# Altium PCB Pcb1.PcbDoc
Units mm, origin at the board's own origin, x right, y up, seen from the top; angles counter-clockwise.
Board outline 25.94 x 43.74 mm, 4 copper layers (Top Layer, Int1 (GND), Int2 (PWR), Bottom Layer), stack 1.369 mm thick; 56 components, 27 nets, 162 pads, 88 vias.
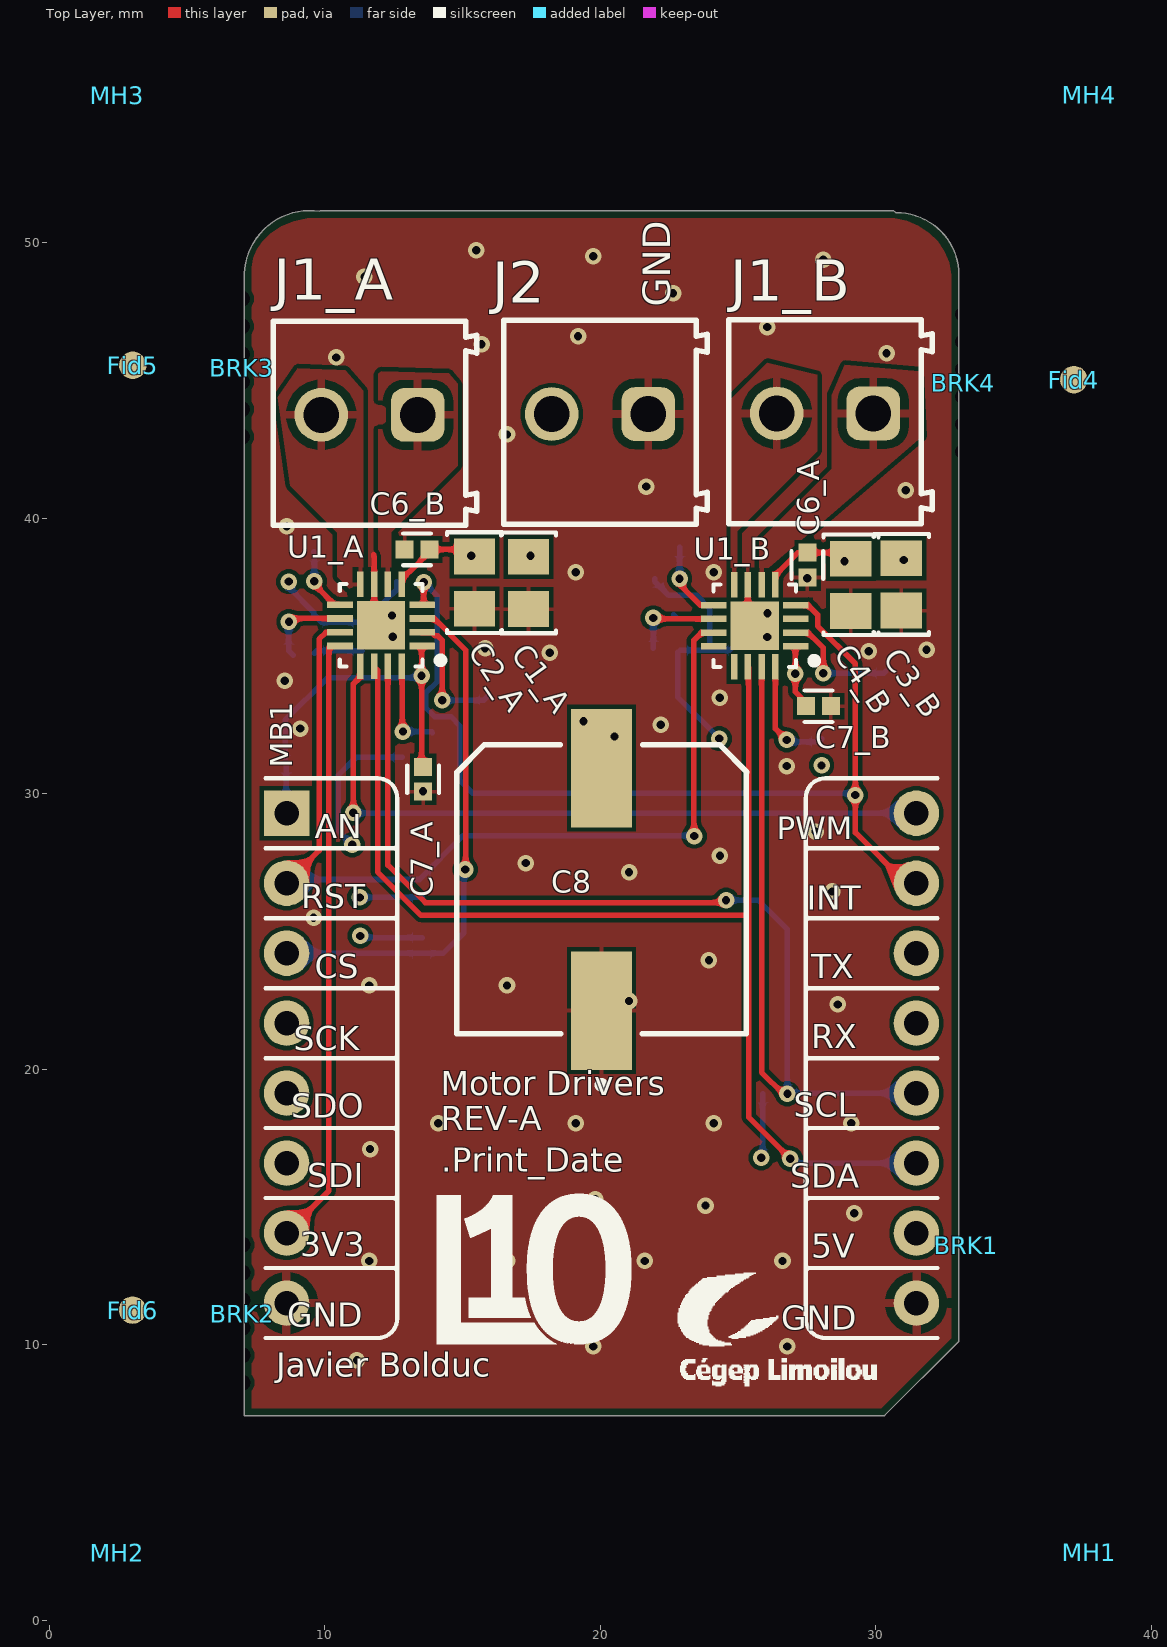
[diagram p0: Top Layer view]
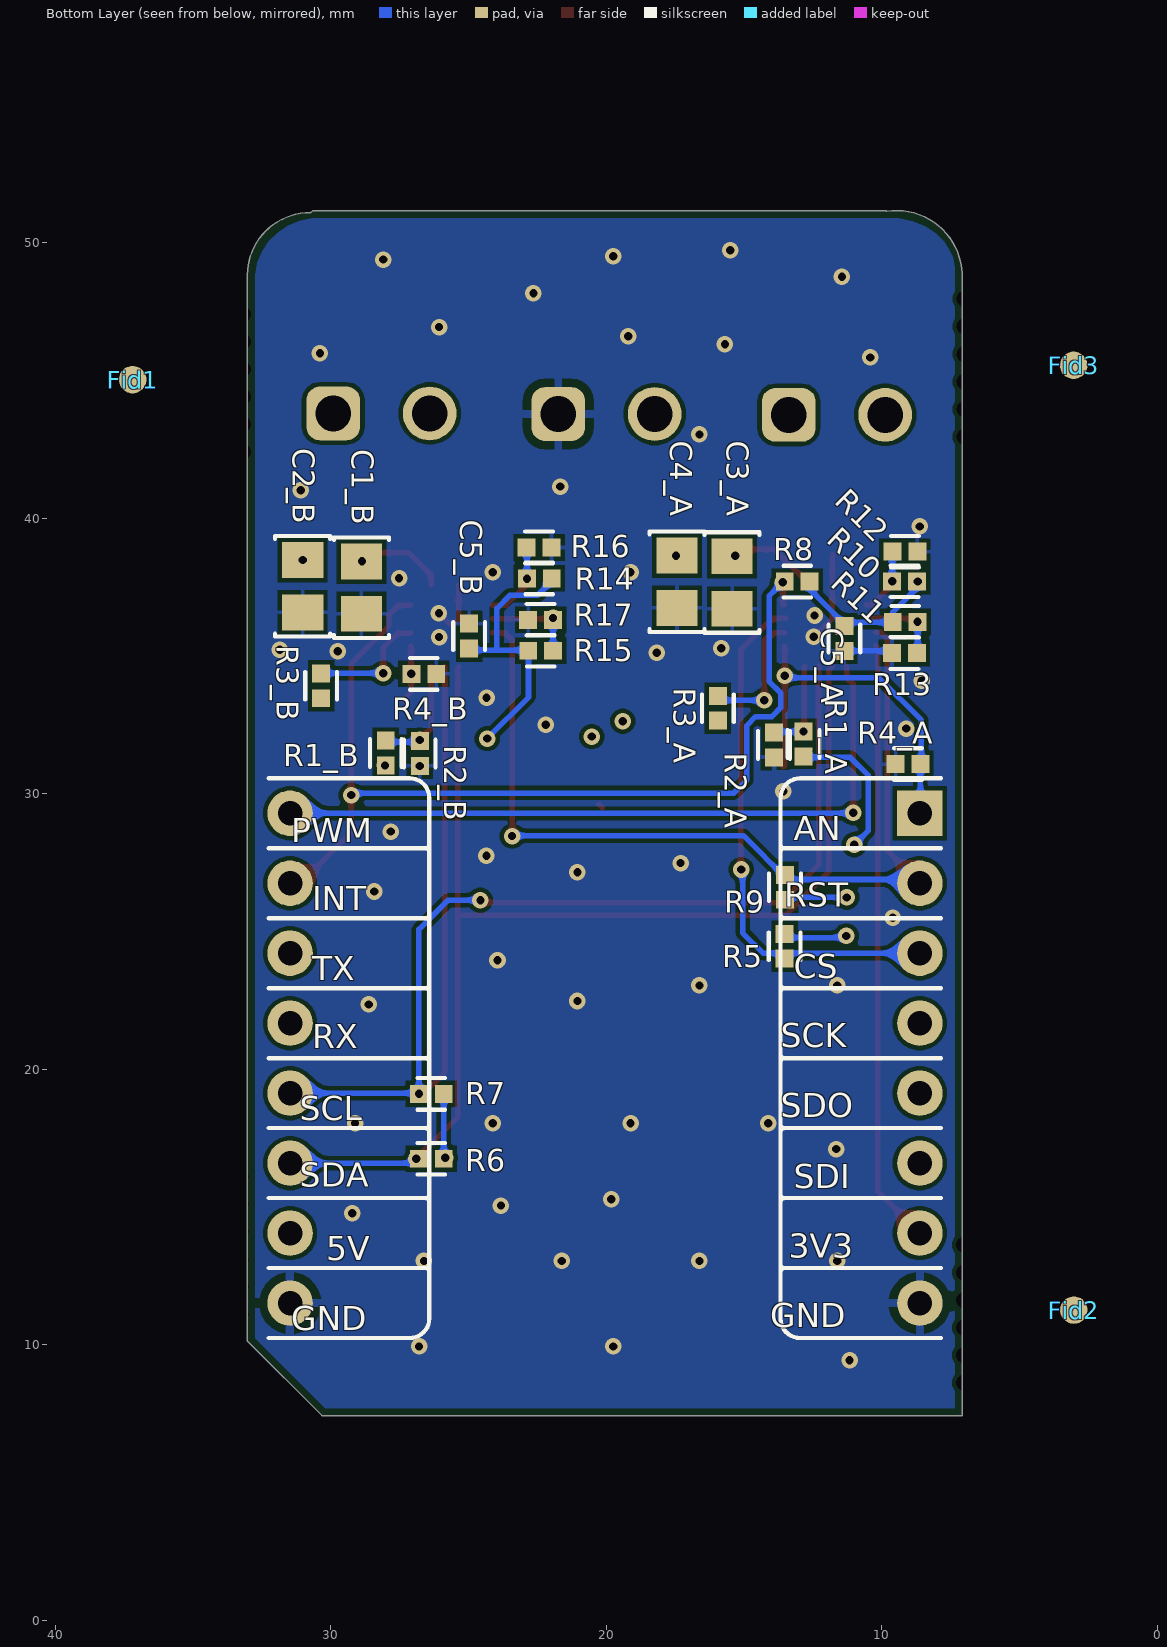
[diagram p1: Bottom Layer view, seen from below]
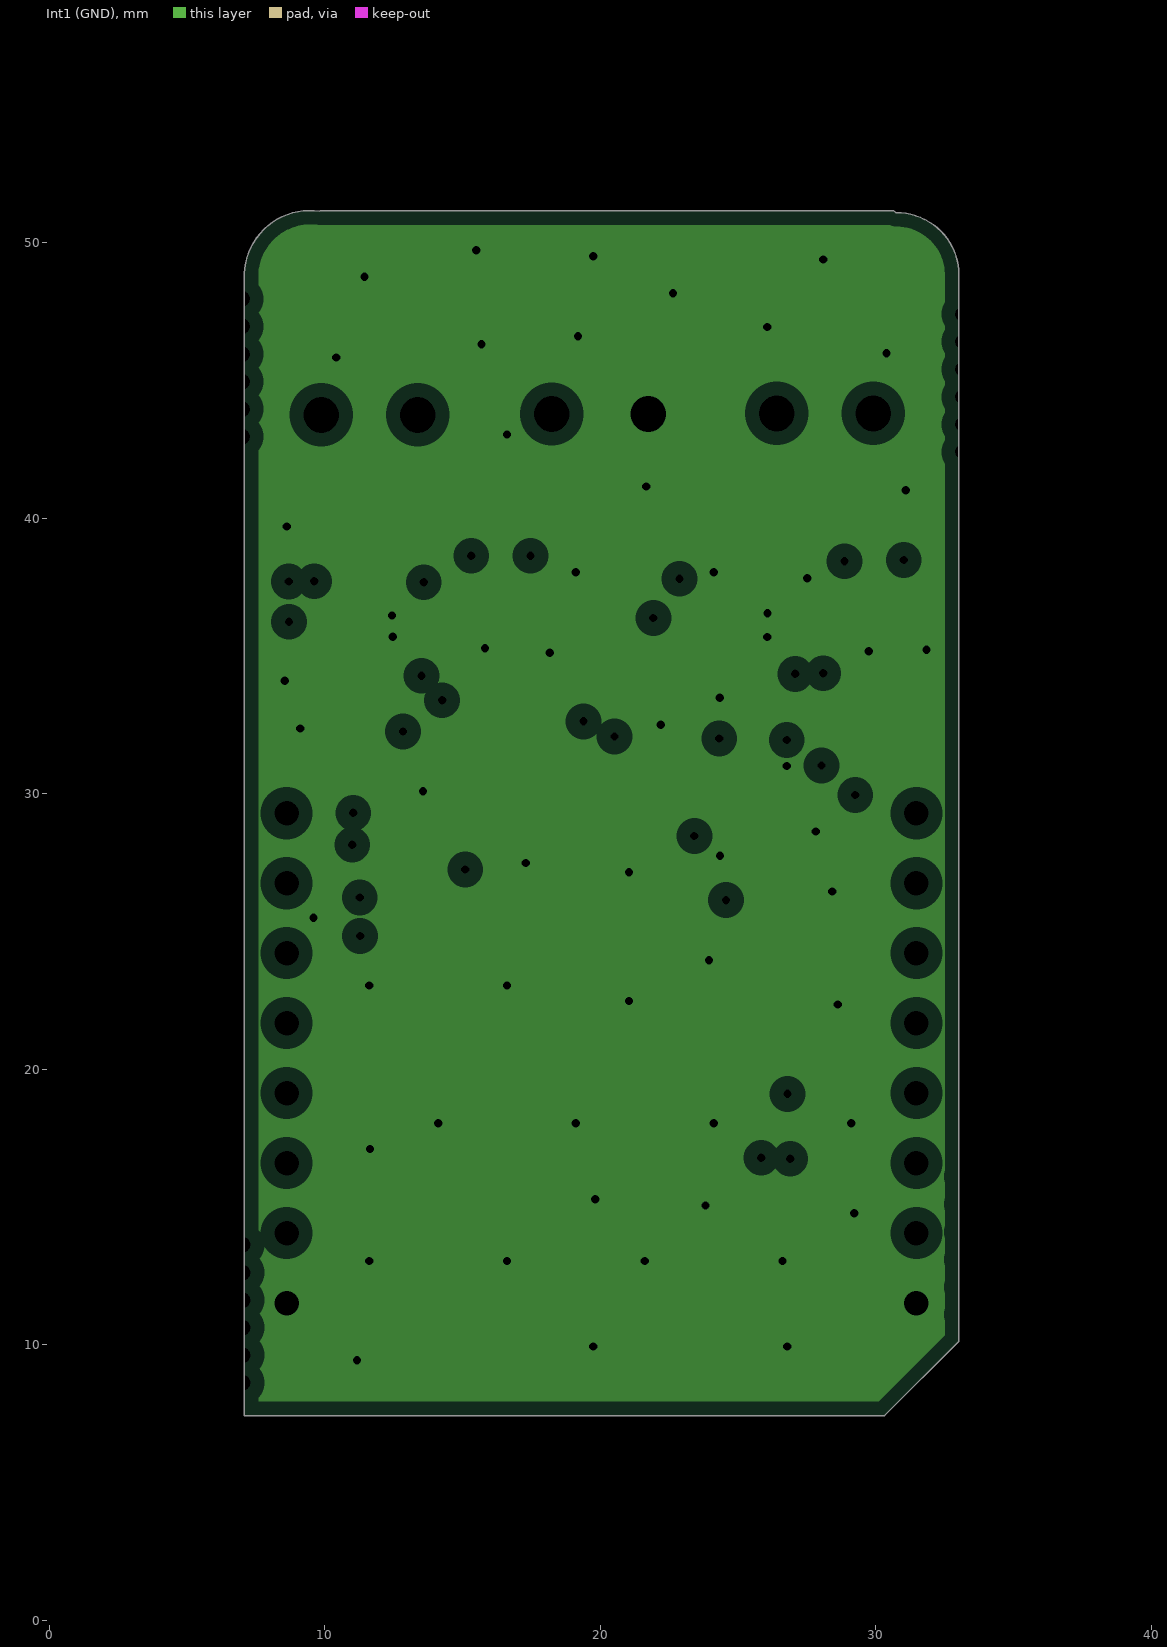
[diagram p2: Int1 (GND), clearances drawn from the general rule]
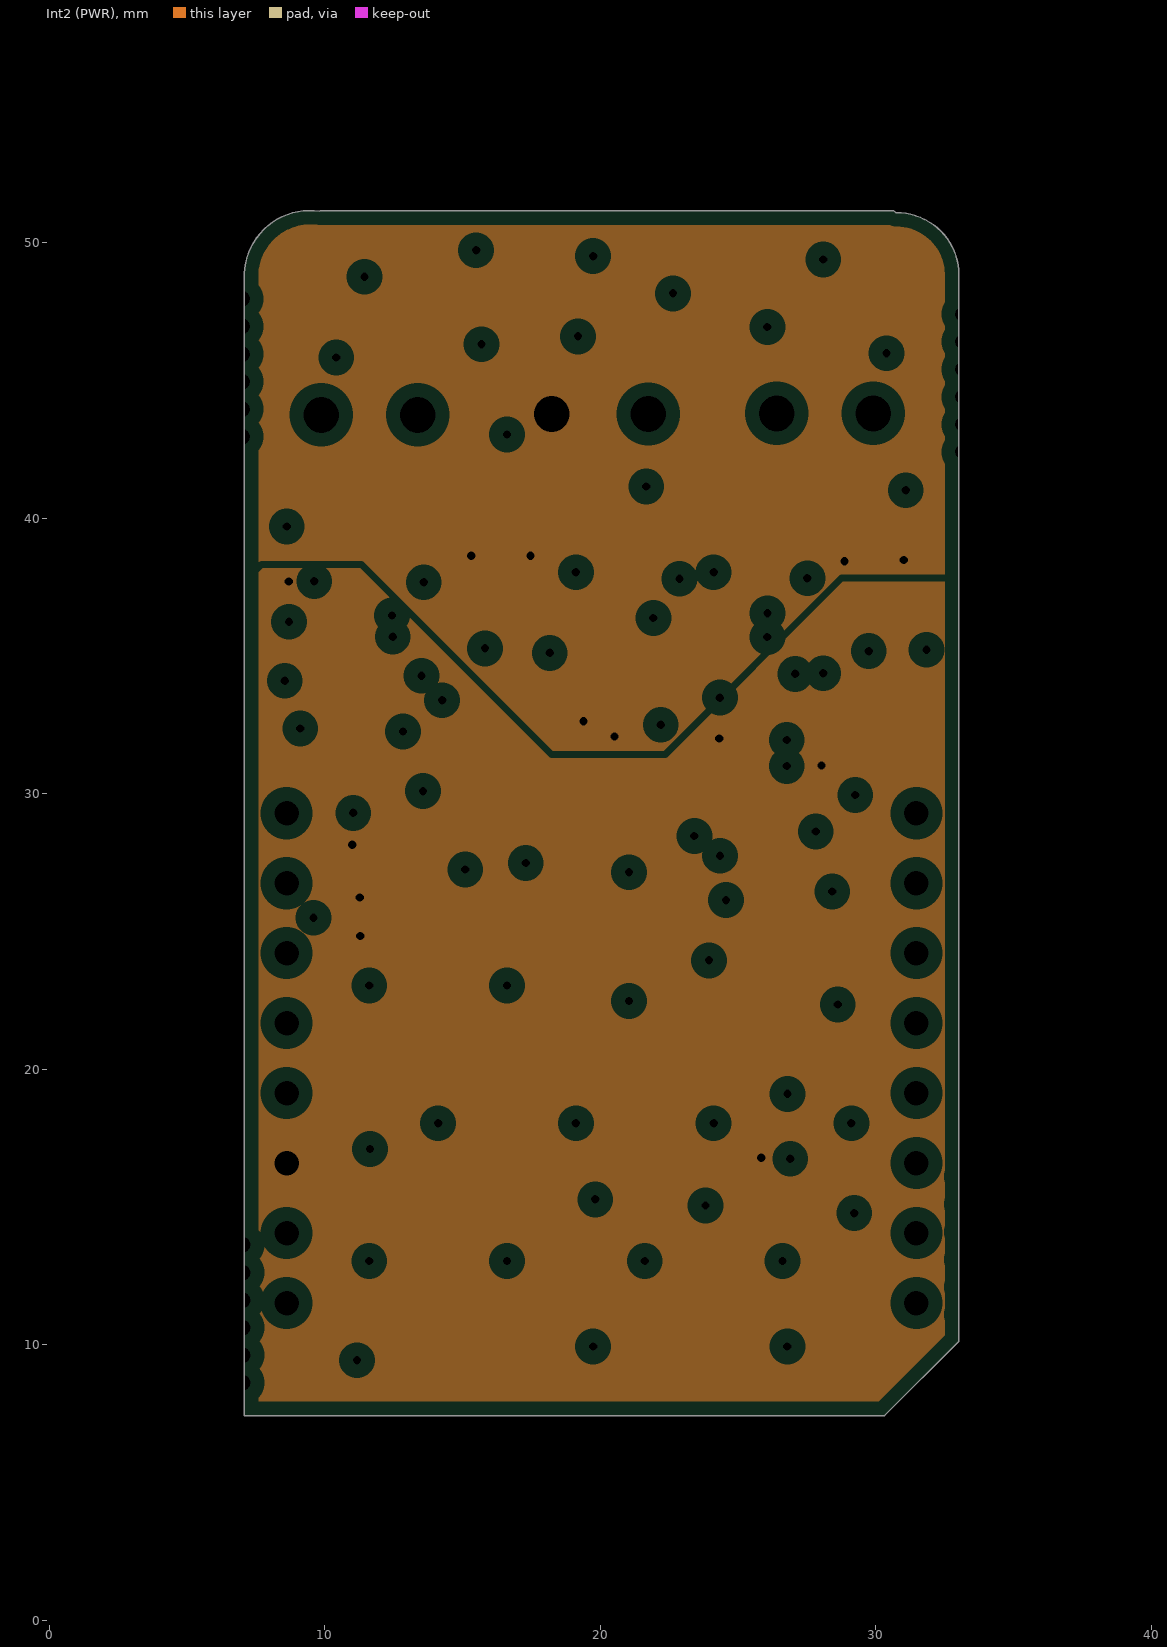
[diagram p3: Int2 (PWR), clearances drawn from the general rule]

## Layer stack, top to bottom
Top Solder: solder mask 0.0254, SM-001, Dk 4
Top Layer: signal copper 0.035
Dielectric 1: prepreg 0.1295, PP-017, Dk 4.3
Dielectric 2: prepreg 0.1295, PP-017, Dk 4.3
Int1 (GND): plane copper 0.035, net GND
Dielectric 3: core 0.7112, Core-039, Dk 4.8
Int2 (PWR): plane copper 0.035, net (Multiple Nets)
Dielectric 4: prepreg 0.1295, PP-017, Dk 4.3
Dielectric 5: prepreg 0.1295, PP-017, Dk 4.3
Bottom Layer: signal copper 0.035
Bottom Solder: solder mask 0.0254, SM-001, Dk 4

## Board outline
7.089,7.425 7.089,48.682 7.083,48.67 cw(c9.475,48.775) 9.83,51.143 9.836,51.155 30.664,51.155 30.741,51.092 cw(c30.741,48.785) 32.371,50.416 cw(c30.789,48.834) 33.026,48.834 33.026,10.126 30.325,7.425

## Design rules (kind name [scope] priority, off if disabled: settings)
BoardOutlineClearance [All] p1: gap=0.2 ignorepadtopadclearanceinfootprint=FALSE
Clearance [All] p1: gap=0.15 ignorepadtopadclearanceinfootprint=FALSE
DiffPairsRouting [All] p1: maxlimit=0.125 minlimit=0.125 mostfreqgap=0.125 toplayer_minwidth=0.125 toplayer_maxwidth=0.125 toplayer_prefwidth=0.125 bottomlayer_minwidth=0.125 bottomlayer_maxwidth=0.125 bottomlayer_prefwidth=0.125 maxuncoupledlength=15
HoleSize [All] p1: absolutevalues=TRUE maxlimit=5 minlimit=0.2 maxpercent=80.000 minpercent=20.000
HoleToHoleClearance [All] p1: gap=0.3 allowstackedmicrovias=TRUE
MinimumSolderMaskSliver [All] p1: minsoldermaskwidth=0.075
PlaneClearance [All] p1: clearance=0.5
PlaneConnect [All] p1: pad.planeconnectstyle=Relief pad.reliefexpansion=0.508 pad.reliefentries=4 pad.reliefconductorwidth=0.254 pad.reliefairgap=0.15 via.planeconnectstyle=Direct via.reliefexpansion=0.508 via.reliefentries=4 via.reliefconductorwidth=0.254 via.reliefairgap=0.254
PolygonConnect [All] p1: thpad.connectstyle=Relief thpad.reliefconductorwidth=0.3 thpad.reliefentries=4 thpad.polygonreliefangle="90 Angle" thpad.airgapwidth=0.3 smdpad.connectstyle=Relief smdpad.reliefconductorwidth=0.15 smdpad.reliefentries=4 smdpad.polygonreliefangle="90 Angle" smdpad.airgapwidth=0.15 via.connectstyle=Direct via.reliefconductorwidth=0.254 via.reliefentries=4 via.polygonreliefangle="90 Angle" via.airgapwidth=0.254
RoutingVias [All] p1: holewidth=0.3 width=0.6 viastyle="Through Hole" minholewidth=0.3 minwidth=0.6 maxholewidth=0.7 maxwidth=1.2
SilkToSilkClearance [All] p1: silktosilkclearance=0
SilkToSolderMaskClearance [IsPad] p1: minsilkscreentomaskgap=0 clearancetoexposedcopper=TRUE
SolderMaskExpansion [All] p1: expansion=0.102 istentingtop=FALSE
Width [All] p1: maxlimit=5 minlimit=0.15 preferedwidth=0.2
22 further rules are at their usual default settings.

## Classes and differential pairs
channel class Driver: MotorDrive-A MotorDrive-B
component class MotorDrive-B: C1_B C2_B C3_B C4_B C5_B C6_B C7_B J1_B R1_B R2_B R3_B R4_B U1_B
component class MotorDrive-A: C1_A C2_A C3_A C4_A C5_A C6_A C7_A J1_A R1_A R2_A R3_A R4_A U1_A
component class Cegep-tabloid: BRK1 BRK2 BRK3 BRK4 C8 Fid1 Fid2 Fid3 Fid4 Fid5 Fid6 J2 MB1 MH1 MH2 MH3 MH4 R5 R6 R7 R8 R9 R10 R11 R12 R13 R14 R15 R16 R17

## Components (designator, comment, footprint, x,y, rotation, side; value= is the part's Value field where it differs from the comment)
BRK1 "DNP" BK_CRACK1B_M 33.286,16.098 r90 top value=2mm
BRK2 "DNP" BK_CRACK1B_M 7.009,8.619 r270 top value=2mm
BRK3 "DNP" BK_CRACK1B_M 6.989,42.96 r270 top value=2mm
BRK4 "DNP" BK_CRACK1B_M 33.19,47.407 r90 top value=2mm
C1_A "CAP CER 10uF 25V X5R 0805" C_2012[0805] 17.4,37.65 r270 top value=10uF (schematic designator C1)
C1_B "CAP CER 10uF 25V X5R 0805" C_2012[0805] 28.889,37.479 r270 bottom value=10uF (schematic designator C1)
C2_A "CAP CER 10uF 25V X5R 0805" C_2012[0805] 15.441,37.665 r270 top value=10uF (schematic designator C2)
C2_B "CAP CER 10uF 25V X5R 0805" C_2012[0805] 31.023,37.53 r270 bottom value=10uF (schematic designator C2)
C3_A "CAP CER 10uF 25V X5R 0805" C_2012[0805] 15.435,37.666 r270 bottom value=10uF (schematic designator C3)
C3_B "CAP CER 10uF 25V X5R 0805" C_2012[0805] 30.934,37.595 r270 top value=10uF (schematic designator C3)
C4_A "CAP CER 10uF 25V X5R 0805" C_2012[0805] 17.434,37.694 r270 bottom value=10uF (schematic designator C4)
C4_B "CAP CER 10uF 25V X5R 0805" C_2012[0805] 29.102,37.581 r270 top value=10uF (schematic designator C4)
C5_A "CAP CER 100nF 50V 0402" C_1005[0402] 11.359,35.633 r270 bottom value=100nF (schematic designator C5)
C5_B "CAP CER 100nF 50V 0402" C_1005[0402] 24.981,35.722 r90 bottom value=100nF (schematic designator C5)
C6_A "CAP CER 100nF 50V 0402" C_1005[0402] 27.525,38.3 r270 top value=100nF (schematic designator C6)
C6_B "CAP CER 100nF 50V 0402" C_1005[0402] 13.352,38.866 r180 top value=100nF (schematic designator C6)
C7_A "CAP CER 10nF 50V X7R 0402" C_1005[0402] 13.575,30.525 r90 top value=10nF (schematic designator C7)
C7_B "CAP CER 10nF 50V X7R 0402" C_1005[0402] 27.928,33.176 r180 top value=10nF (schematic designator C7)
C8 "CAP EL 100uF 63V 10MM" C_EL_D10MM-L11MM 20.051,26.529 r90 top value=100uF
Fid1 "DNP" FD_Fiducial#1 37.193,45.03 r0 top value="Fiducial for Pick&Place"
Fid2 "DNP" FD_Fiducial#1 3.029,11.256 r90 top value="Fiducial for Pick&Place"
Fid3 "DNP" FD_Fiducial#1 3.035,45.551 r90 top value="Fiducial for Pick&Place"
Fid4 "DNP" FD_Fiducial#2 37.193,45.03 r90 top value="Fiducial for Pick&Place"
Fid5 "DNP" FD_Fiducial#2 3.035,45.551 r90 top value="Fiducial for Pick&Place"
Fid6 "DNP" FD_Fiducial#2 3.029,11.256 r90 top value="Fiducial for Pick&Place"
J1_A "DB301V-3.5-2P-GN-S" CONN_TERM_BLOCK_2POS_3mm5 11.628,43.451 r180 top (schematic designator J1)
J1_B "DB301V-3.5-2P-GN-S" CONN_TERM_BLOCK_2POS_3mm5 28.162,43.503 r180 top (schematic designator J1)
J2 "DB301V-3.5-2P-GN-S" CONN_TERM_BLOCK_2POS_3mm5 19.994,43.48 r180 top
MB1 "mikroBUS" "mikroBUS - Midi" 7.35,7.7 r0 top locked
MH1 "DNP" MP_M-Hole_M2-NonPlated 37.75,2.45 r0 top value="Mounting Hole 2mm non plated"
MH2 "DNP" MP_M-Hole_M2-NonPlated 2.475,2.45 r0 top value="Mounting Hole 2mm non plated"
MH3 "DNP" MP_M-Hole_M2-NonPlated 2.475,55.35 r0 top value="Mounting Hole 2mm non plated"
MH4 "DNP" MP_M-Hole_M2-NonPlated 37.75,55.35 r0 top value="Mounting Hole 2mm non plated"
R1_A "Res 2k2 1% 0402" R_1005[0402] 12.843,31.805 r90 bottom value=2k2 (schematic designator R1)
R1_B "Res 2k2 1% 0402" R_1005[0402] 28.005,31.477 r90 bottom value=2k2 (schematic designator R1)
R2_A "Res 2k2 1% 0402" R_1005[0402] 13.914,31.771 r270 bottom value=DNP (schematic designator R2)
R2_B "Res 2k2 1% 0402" R_1005[0402] 26.77,31.46 r270 bottom value=DNP (schematic designator R2)
R3_A "Res 2k2 1% 0402" R_1005[0402] 15.95,33.1 r270 bottom value=DNP (schematic designator R3)
R3_B "Res 2k2 1% 0402" R_1005[0402] 30.352,33.914 r270 bottom value=DNP (schematic designator R3)
R4_A "Res 7k5 1% 0402" R_1005[0402] 9.05,31.075 r0 bottom value=7k5 (schematic designator R4)
R4_B "Res 7k5 1% 0402" R_1005[0402] 26.625,34.35 r180 bottom value=7k5 (schematic designator R4)
R5 "Res 10k 1% 0402" R_1005[0402] 13.529,24.462 r270 bottom value=10k
R6 "Res 2k2 1% 0402" R_1005[0402] 26.35,16.75 r0 bottom value=2k2
R7 "Res 2k2 1% 0402" R_1005[0402] 26.35,19.104 r0 bottom value=2k2
R8 "Res 10k 1% 0402" R_1005[0402] 13.072,37.697 r0 bottom value=10k
R9 "Res 2k2 1% 0402" R_1005[0402] 13.514,26.6 r90 bottom value=DNP
R10 "Res 2k2 1% 0402" R_1005[0402] 9.174,37.71 r0 bottom value=DNP
R11 "Res 2k2 1% 0402" R_1005[0402] 9.155,36.238 r180 bottom value=DNP
R12 "Res 2k2 1% 0402" R_1005[0402] 9.161,38.786 r180 bottom value=2k2
R13 "Res 2k2 1% 0402" R_1005[0402] 9.179,35.107 r0 bottom value=2k2
R14 "Res 2k2 1% 0402" R_1005[0402] 22.429,37.817 r0 bottom value=DNP
R15 "Res 2k2 1% 0402" R_1005[0402] 22.383,35.189 r180 bottom value=2k2
R16 "Res 2k2 1% 0402" R_1005[0402] 22.442,38.938 r180 bottom value=2k2
R17 "Res 2k2 1% 0402" R_1005[0402] 22.387,36.312 r0 bottom value=DNP
U1_A "DRV8234RTER" U_WQFN50P300X300-16 12.047,36.111 r180 top (schematic designator U1)
U1_B "DRV8234RTER" U_WQFN50P300X300-16 25.613,36.097 r180 top (schematic designator U1)

## Footprints (in the part's own frame and the unit in brackets; to place one, negate y for a bottom-side part, rotate by r counter-clockwise, add the part's x,y. Pads: shape width x height; smd on the part's side, far side on the other; paste and mask are expansions set on the pad)
BK_CRACK1B_M [mm] "Cracker métrique NPTH"
  round 0 hole 0.6 unplated: 1(0,0) 2(-1,0) 3(-2,0) 4(-3,0) 5(-4,0) 6(-5,0)
C_1005[0402] [mm] "Capacitor MLCC; Body 1.1 x 0.5 mm (LxW typ)"
  rect 0.65x0.65 smd mask+0.075: 1(-0.45,0) 2(0.45,0)
  silkscreen extent -0.5,-0.57 0.5,0.58, body extent -0.51,-0.25 0.51,0.25, height 0.51
C_2012[0805] [mm] "Capacitor MLCC; Body 2.0 x 1.3 mm (LxW typ)"
  rect 1.3x1.5 smd: 1(-0.95,0) 2(0.95,0)
  silkscreen extent -1.83,-1 1.83,1, body extent -1,-0.62 1,0.63, height 0.78
C_EL_D10MM-L11MM [mm] "SMD, D10xL10.5mm"
  rect 4.3x2.2 smd paste+0 mask+0: 1(-4.4,0) 2(4.4,0)
  silkscreen extent -7.22,-5.28 5.25,5.25, body extent -6.8,-5.5 6.8,5.5, height 0.25
CONN_TERM_BLOCK_2POS_3mm5 [mm] "3.50 mm Horizontal Entry Modular, 2p"
  rrect50% 1.95x1.95 hole 1.3: 1(-1.75,-0.3)
  round 1.95 hole 1.3: 2(1.75,-0.3)
  silkscreen extent -3.9,-3.7 3.5,3.7, body extent -3.95,-3.7 3.5,3.7, height 8.55
FD_Fiducial#1 [mm] "Fiducial"
  round 1 smd far side paste-0.5 mask+1: 1(0,0)
FD_Fiducial#2 [mm] "Fiducial"
  round 1 smd paste-0.5 mask+1: 1(0,0)
"mikroBUS - Midi" [mil]
  rect 65x65 hole 35: 1(50,850)
  round 65 hole 35: 2(50,750) 3(50,650) 4(50,550) 5(50,450) 6(50,350) 7(50,250) 8(50,150) 9(950,150) 10(950,250) 11(950,350) 12(950,450) 13(950,550) 14(950,650) 15(950,750) 16(950,850)
  silkscreen extent 20,100 980,900, body extent -5,100 1010,900, height 82
MP_M-Hole_M2-NonPlated [mm] "Monting Hole M2 non plated"
  round 1.5 hole 2.5 unplated paste-2539.97: 1(0,0)
R_1005[0402] [mm] "Chip Resistor; Body 1.1 x 0.5 mm (LxW typ)"
  rect 0.65x0.65 smd mask+0.075: 1(-0.45,0) 2(0.45,0)
  silkscreen extent -0.5,-0.57 0.5,0.58, body extent -0.5,-0.25 0.5,0.26, height 0.36
U_WQFN50P300X300-16 [mm]
  rect 0.931x0.239 smd paste+0 mask+0: 1(-1.491,0.75) 2(-1.491,0.25) 3(-1.491,-0.25) 4(-1.491,-0.75) 9(1.491,-0.75) 10(1.491,-0.25) 11(1.491,0.25) 12(1.491,0.75)
  rect 0.239x0.931 smd paste+0 mask+0: 5(-0.75,-1.491) 6(-0.25,-1.491) 7(0.25,-1.491) 8(0.75,-1.491) 13(0.75,1.491) 14(0.25,1.491) 15(-0.25,1.491) 16(-0.75,1.491)
  rect 1.75x1.75 smd paste-0.862 mask+0: 17(0,0)
  silkscreen extent -2.28,-1.5 1.5,1.5, body extent -1.5,-1.5 1.5,1.5, height 0.8

## Part data
BRK1 BRK2 BRK3 BRK4: library part BK_BREAKOUT_2MM, "Mouse Bites", Manufacturer_PN=DNP, RoHS=N/A, Technology=N/A
C1_A C1_B C2_A C2_B C3_A C3_B C4_A C4_B: library part CAP020, "Capacitor type 1", Dielectric=X5R, Manufacturer 1=Samsung, Manufacturer Part Number 1=CL21A106KAYNNNE, Rated Voltage=25V, Supplier Part Number 1=C86038, Tolerance=10%, LibRef=CAP020, Mounting Technology=SMT, Supplier 1=LCSC
C5_A C5_B C6_A C6_B: library part CAP001, "Capacitor type 1", Dielectric=X7R, Manufacturer 1="Taiyo Yuden", Manufacturer Part Number 1=UMK105B7104KV-FR, Rated Voltage=50V, Supplier Part Number 1=C2167491, Tolerance=10%, Code CEGEP=KCOND01SM, LibRef=CAP001, Mounting Technology=SMT, Supplier 1=LCSC
C7_A C7_B: library part CAP017, "Capacitor type 1", Dielectric=X7R, Manufacturer 1=Yageo, Manufacturer Part Number 1=CC0402KRX7R9BB103, Rated Voltage=50V, Supplier Part Number 1=C60133, Tolerance=10%, LibRef=CAP017, Mounting Technology=SMT, Supplier 1=LCSC
C8: library part CAP021, "Capacitor type EL", Dielectric=EL, Manufacturer 1=HRK, Manufacturer Part Number 1=GVT1J107M1010CNVC, Rated Voltage=63V, Supplier Part Number 1=C2983410, Tolerance=20%, LibRef=CAP021, Mounting Technology=SMT, Supplier 1=LCSC
Fid1 Fid2 Fid3 Fid4 Fid5 Fid6: library part Fiducial, "Fiducial for Pick&Place", Manufacturer_PN=DNP
J1_A J1_B J2: library part CONN-3MM5-2POS-TERM-BLOCK, "CONN TERM BLOCK 2POS 3.5mm pitch", Manufacturer 1=Dorabo, Supplier Part Number 1=C695629, Manufacturer Part Number 1=DB301V-3.5-2P-GN-S, Mounting Technology=TH, Supplier 1=LCSC
MB1: library part "mikroBUS compatible add-on board", "mikroBUS compatible add-on board"
MH1 MH2 MH3 MH4: library part MH-2MM_NP, "Mounting Hole 2mm non plated", Supplier Part Number 1=N/A, Manufacturer Part Number 1=DNP
R1_A R1_B R2_A R2_B R3_A R3_B R6 R7 R9 R10 R11 R12 R13 R14 R15 R16 R17: library part RES008, "Resistor type 1", Manufacturer 1=Yageo, Manufacturer Part Number 1=RC0402FR-072K2L, Max Working Voltage=50V, Supplier Part Number 1=C114762, Tolerance=1%, Code CEGEP=RES2.2KSM, LibRef=RES008, Mounting Technology=SMT, Puissance=1/16W, Supplier 1=LCSC, Supplier 2=Digi-Key, Supplier Part Number 2=311-2.20KLRCT-ND
R4_A R4_B: library part RES027, "Resistor type 1", Manufacturer 1=Yageo, Manufacturer Part Number 1=RC0402FR-077k5L, Max Working Voltage=50V, Supplier Part Number 1=C137934, Tolerance=1%, LibRef=RES027, Mounting Technology=SMT, Puissance=1/16W, Supplier 1=LCSC
R5 R8: library part RES003, "Resistor type 1", Manufacturer 1=Yageo, Manufacturer Part Number 1=RC0402FR-0710KL, Max Working Voltage=50V, Supplier Part Number 1=C60490, Tolerance=1%, LibRef=RES003, Mounting Technology=SMT, Puissance=1/16W, Supplier 1=LCSC
U1_A U1_B: library part U_DRV8234, "Brushed DC H-bridge Motor Driver with Ripple Counting, Stall Detection, and Speed Regulation 38V 2A 16-WQFN", Manufacturer 1="Texas Instruments", Manufacturer Part Number 1=DRV8234RTER, Mounting Technology=SMT, Supplier 1=LCSC

## Via types
v1: diameter 0.6, hole 0.3, Top Layer to Bottom Layer, tented both sides, 85 vias
v2: diameter 0.6, hole 0.3, Top Layer to Bottom Layer, tented bottom, 2 vias
v3: diameter 0.6, hole 0.3, Top Layer to Bottom Layer, 1 vias

## Nets (pads, with @x,y where several pads share a name; then routed paths per layer and width w, separated by ;. In a path a pad name is that pad's centre, name@x,y a point inside that pad or via, vN(x,y) a via of type N, cw(c..) or ccw(c..) an arc to the next point about the centre after c; other vN are vias at no path point)
DIR: MB1.7 U1_A.12 | length 22
  Top Layer w0.2: MB1.7 10.15,15.58 10.15,35.301 U1_A.12@10.218,35.368
FAULT: MB1.15 R8.2 U1_A.4 U1_B.4 | length 36.3
  Top Layer w0.2: U1_A.4 13.577,36.861 13.597,36.88 v1(13.597,37.677) ; U1_B.4 27.542,36.847 27.893,36.496 27.893,36.087 29.263,34.717 v1(29.263,29.949) 29.263,28.585 31.098,26.75 MB1.15
  Bottom Layer w0.2: v1(13.597,37.677) 14.094,37.18 14.094,34.078 13.668,33.653 13.668,33.121 13.993,32.796 14.579,32.796 14.9,32.475 14.9,30.5 15.375,30.025 29.187,30.025 v1(29.263,29.949)
GND: C1_A.2 C1_B.2 C2_A.2 C2_B.2 C3_A.2 C3_B.2 C4_A.2 C4_B.2 C5_A.2 C5_B.2 C6_A.2 C6_B.2 C7_A.1 C7_B.1 C8.1 J2.1 MB1.8 MB1.9 R2_A.2 R2_B.2 R4_A.2 R4_B.2 R12.2 R13.2 R16.2 R17.2 U1_A.7 U1_A.17 U1_B.7 U1_B.17 | length 7.5
  Top Layer w0.2: 11.775,38.675 11.775,38.625 11.797,38.603 U1_A.7 11.797,36.361 U1_A.17 12.064,36.111 v1(12.475,35.7) ; U1_B.7 25.363,36.347 U1_B.17 26.067,36.552 v1(26.077,36.552)
  Bottom Layer w0.2: R13.2 9.706,35.183 C5_A.2 ; R17.2@22.666,36.504 R17.2@22.793,36.377
  other v1: 11.171,9.437 19.746,9.937 26.796,9.937 11.62,13.04 16.62,13.04 21.62,13.04 26.62,13.04 29.225,14.775 23.825,15.05 19.825,15.275 11.65,17.1 14.12,18.04 19.12,18.04 24.12,18.04 29.12,18.04 28.625,22.35 21.05,22.475 11.62,23.04 16.62,23.04 23.95,23.95 9.6,25.5 28.425,26.45 21.05,27.15 17.303,27.483 24.35,27.75 27.825,28.625 13.57,30.094 26.776,31.004 9.112,32.363 22.2,32.5 24.346,33.487 8.55,34.1 18.171,35.112 29.75,35.175 31.85,35.225 15.825,35.275 26.071,35.687 12.442,36.468 27.523,37.823 19.12,38.04 24.12,38.04 8.625,39.7 31.096,41.012 21.675,41.15 16.62,43.04 10.421,45.837 30.396,45.987 15.696,46.312 19.2,46.6 26.071,46.937 22.646,48.162 11.446,48.762 28.096,49.387 19.746,49.512 15.5,49.725
IPROP: C7_A.2 MB1.1 R4_A.1 U1_A.1 | length 13.4
  Top Layer w0.2: U1_A.1 13.519,35.342 v1(13.519,34.281) 13.519,31.031 C7_A.2
  Bottom Layer w0.2: MB1.1 8.6,29.31 R4_A.1 8.562,31.113 8.562,32.669 10.098,34.206 13.444,34.206 v1(13.519,34.281)
NetC7_B_2: C7_B.2 R4_B.1 U1_B.1 | length 2.2
  Top Layer w0.2: U1_B.1 27.085,35.329 v1(27.085,34.35) 27.085,33.697 27.275,33.507 27.275,33.457 27.362,33.369 C7_B.2@27.412,33.369
  Bottom Layer w0.2: R4_B.1 R4_B.1@27.085,34.35
NetR1_A_2: R1_A.2 R2_A.1 U1_A.16 | length 3.5
  Top Layer w0.2: U1_A.16 12.816,34.6 12.816,32.281 v1(12.843,32.255)
  Bottom Layer w0.2: v1(12.843,32.255) 13.88,32.255 R2_A.1
NetR1_B_2: R1_B.2 R2_B.1 U1_B.16 | length 4.1
  Top Layer w0.2: U1_B.16 26.363,32.362 v1(26.775,31.95)
  Bottom Layer w0.2: R2_B.1@26.862,31.978 26.963,31.877 27.936,31.877 R1_B.2@28.049,31.99
NetR3_A_1: R3_A.1 U1_A.2 | length 4.8
  Top Layer w0.2: U1_A.2@13.52,35.841 13.903,35.841 14.013,35.73 14.106,35.73 14.265,35.572 v1(14.265,33.389)
  Bottom Layer w0.2: v1(14.265,33.389) 15.773,33.389 R3_A.1@15.95,33.566
NetR3_B_1: R3_B.1 U1_B.2 | length 4.4
  Top Layer w0.2: U1_B.2 27.123,35.828 27.562,35.828 28.1,35.289 v1(28.1,34.375)
  Bottom Layer w0.2: v1(28.1,34.375) 30.3,34.375 R3_B.1@30.375,34.45
NetR10_2: R10.2 R12.1 U1_A.9 | length 2.4
  Top Layer w0.2: v1(9.624,37.71) 9.7,37.633 9.7,37.52 10.36,36.861 U1_A.9
  Bottom Layer w0.2: R12.1 9.624,38.773 v1(9.624,37.71)
NetR11_2: R11.2 R13.1 U1_A.10 | length 3
  Top Layer w0.2: v1(8.705,36.238) 8.813,36.238 8.935,36.361 U1_A.10
  Bottom Layer w0.2: R11.2@8.696,36.108 8.696,35.19 R13.1@8.856,35.03
NetR14_2: R14.2 R16.1 U1_B.9 | length 2.9
  Top Layer w0.2: v1(22.884,37.802) 22.884,37.598 23.634,36.847 U1_B.9
  Bottom Layer w0.2: v1(22.884,37.802) 22.884,38.929 R16.1
NetR15_2: R15.2 R17.1 U1_B.10 | length 3.4
  Top Layer w0.2: v1(21.932,36.378) 21.963,36.347 U1_B.10
  Bottom Layer w0.2: v1(21.932,36.378) 21.944,36.39 R17.1@21.944,36.427 ; R17.1@21.932,36.416 21.932,35.289 R15.2@21.937,35.284
NetU1_B_3: U1_B.3
NetU1_B_12: U1_B.12
NetU1_B_13: U1_B.13
out1_A: J1_A.1 U1_A.6
out1_B: J1_B.1 U1_B.6
out2_A: J1_A.2 U1_A.8
out2_B: J1_B.2 U1_B.8
PWM: MB1.16 U1_A.13 | length 25.9
  Top Layer w0.2: v1(11.04,29.305) 11.04,33.99 11.277,34.227 11.277,34.6 U1_A.13
  Bottom Layer w0.2: v1(11.04,29.305) 11.048,29.297 31.473,29.297 MB1.16
"RC OUT": MB1.3 R5.2 U1_A.3 | length 19.1
  Top Layer w0.2: U1_A.3@13.489,36.373 13.964,36.373 15.122,35.215 15.122,27.266 v1(15.103,27.248)
  Bottom Layer w0.2: MB1.3 14.31,24.21 15.05,24.95 15.05,27.195 v1(15.103,27.248)
SCL: MB1.12 R7.2 U1_A.15 U1_B.15 | length 49.3
  Top Layer w0.2: U1_A.15 12.294,34.618 12.298,34.614 12.298,32.487 12.293,32.482 12.293,27.407 13.656,26.044 24.477,26.044 v1(24.57,26.137) ; U1_B.15 25.863,19.887 v1@26.65,19.1
  Bottom Layer w0.2: v1(24.57,26.137) 25.738,26.137 26.8,25.075 R7.2@26.8,19.13 ; v1(26.8,19.104) R7.2@26.8,19.13 ; MB1.12 R7.2@26.8,19.13
SDA: MB1.11 R6.2 U1_A.14 U1_B.14 | length 44.9
  Top Layer w0.2: U1_A.14 11.927,34.49 11.927,27.161 13.501,25.587 25.364,25.587 25.391,25.614 25.391,34.578 U1_B.14 ; 25.343,25.566 25.391,25.566 25.391,18.259 v1(26.9,16.75)
  Bottom Layer w0.2: R6.2 26.96,16.59 MB1.11
SLEEP: MB1.2 R9.2 U1_A.11 U1_B.11 | length 33.3
  Top Layer w0.2: MB1.2 9.8,27.93 9.8,35.609 10.044,35.853 10.202,35.853 U1_A.11@10.218,35.868 ; v1(23.421,28.462) 23.407,28.476 23.407,35.57 23.683,35.847 U1_B.11
  Bottom Layer w0.2: MB1.2 8.756,26.886 13.436,26.886 15.025,28.475 23.408,28.475 v1(23.421,28.462)
"VCC 3V3": C5_A.1 C5_B.1 MB1.6 R1_A.1 R1_B.1 R5.1 R6.1 R7.1 R8.1 R9.1 R10.1 R11.1 R14.1 R15.1 | length 27.8
  Bottom Layer w0.2: v1(8.7,37.7) 8.7,37.487 9.605,36.582 9.605,36.495 9.881,36.219 11.223,36.219 C5_A.1 11.359,36.163 12.622,37.426 R8.1 ; v1(11,28.15) 10.49,28.66 10.49,30.665 11.148,31.323 R1_A.1@12.811,31.323 ; v1(11.274,26.234) R9.1@13.538,26.234 ; v1@11.281,24.778 R5.1@13.545,24.778 ; R14.1@21.984,37.802 21.984,37.709 22.49,37.203 23.499,37.203 23.975,36.727 23.975,35.296 ; v3(24.325,32) 22.825,33.5 22.825,35.126 22.91,35.211 24.712,35.211 C5_B.1@24.978,35.477 ; v1(25.846,16.783) 25.9,16.836 R7.1
  other v1: 11.289,24.837 28.036,31.026
VM: C1_A.1 C1_B.1 C2_A.1 C2_B.1 C3_A.1 C3_B.1 C4_A.1 C4_B.1 C6_A.1 C6_B.1 C8.2 J2.2 U1_A.5 U1_B.5 | length 7.2
  Top Layer w0.2: U1_A.5 12.797,37.771 13.317,38.291 13.33,38.291 13.477,38.437 13.477,38.451 C6_B.1@13.892,38.866 ; C6_B.1 C6_B.1@13.892,38.866 ; C2_A.1 15.19,38.866 C6_B.1@13.892,38.866 ; C8.2@20.144,29.492 C8.2@20.274,29.621 ; U1_B.5 26.363,37.934 27.179,38.75 C6_A.1 28.884,38.75 C4_B.1
  other v1: 28.871,38.437 31.023,38.48 15.321,38.637 17.471,38.637
  other v2: 20.525,32.075 19.4,32.625
pads on no net: BRK1.1 BRK1.2 BRK1.3 BRK1.4 BRK1.5 BRK1.6 BRK2.1 BRK2.2 BRK2.3 BRK2.4 BRK2.5 BRK2.6 BRK3.1 BRK3.2 BRK3.3 BRK3.4 BRK3.5 BRK3.6 BRK4.1 BRK4.2 BRK4.3 BRK4.4 BRK4.5 BRK4.6 Fid1.1 Fid2.1 Fid3.1 Fid4.1 Fid5.1 Fid6.1 MB1.4 MB1.5 MB1.10 MB1.13 MB1.14 MH1.1 MH2.1 MH3.1 MH4.1 R3_A.2 R3_B.2

## Polygon pours and split planes (outlines as drawn)
GND on Bottom Layer "GND_L04_P006" (solid, remove dead copper, pour order 6): 7.35,7.7 7.35,48.943 cw(c9.057,48.943) 7.85,50.15 cw(c9.612,48.388) 9.612,50.88 9.636,50.88 30.464,50.88 cw(c30.464,48.574) 32.095,50.205 cw(c30.513,48.623) 32.75,48.623 32.75,10.24 30.21,7.7
GND on Top Layer "GND_L01_P005" (solid, remove dead copper, pour order 5): 7.35,7.7 7.35,48.943 cw(c9.057,48.943) 7.85,50.15 cw(c9.612,48.388) 9.612,50.88 9.636,50.88 30.464,50.88 cw(c30.464,48.574) 32.095,50.205 cw(c30.513,48.623) 32.75,48.623 32.75,10.24 30.21,7.7
out1_A on Top Layer "OUT1_A_L01_P001" (solid, pour order 1): 11.95,37.157 11.95,45.346 14.512,45.254 14.825,44.878 14.825,41.9 12.413,39.488 12.413,37.143
out1_B on Top Layer "OUT1_B_L01_P004" (solid, pour order 4): 31.588,45.334 31.692,42.973 25.975,38.075 25.975,37.15 25.8,37.15 25.775,37.125 25.775,39.175 28.4,41.8 28.4,44.469 28.887,45.564
out2_B on Top Layer "OUT2_B_L01_P002" (solid, pour order 2): 26.065,45.64 24.75,44.325 24.75,37.125 24.975,37.125 24.975,39.525 27.875,42.425 27.875,45.203
out2_A on Top Layer "OUT2_A_L01_P000" (solid, pour order 0): 11.407,44.625 11.407,43.818 11.407,37.14 11.185,37.14 10.45,37.875 10.45,39.475 8.751,41.174 8.298,44.387 9.031,45.439 10.75,45.375
VM on Int2 (PWR) (split plane): 9.66,50.652 9.754,50.638 9.755,50.64 9.759,50.64 9.788,50.634 9.809,50.635 9.83,50.633 9.859,50.636 9.888,50.636 9.908,50.64 9.929,50.643 9.936,50.645 30.495,50.645 30.498,50.643 30.522,50.632 30.545,50.62 30.568,50.613 30.59,50.604 30.616,50.599 30.641,50.591 30.665,50.589 30.688,50.584 30.714,50.584 30.741,50.581 30.741,50.583 30.917,50.575 31.091,50.549 31.262,50.506 31.429,50.446 31.588,50.371 31.739,50.28 31.881,50.175 32.001,50.066 32.01,50.055 32.021,50.047 32.126,49.931 32.227,49.795 32.314,49.649 32.386,49.496 32.444,49.336 32.485,49.172 32.51,49.004 32.517,48.848 32.516,48.834 32.516,37.954 28.765,37.954 28.716,37.945 28.674,37.917 22.312,31.554 18.289,31.554 11.427,38.417 11.385,38.445 11.335,38.454 7.7,38.454 7.65,38.445 7.608,38.417 7.599,38.407 7.599,48.682 7.596,48.71 7.596,48.739 7.592,48.76 7.589,48.781 7.589,48.783 7.598,48.96 7.625,49.143 7.67,49.323 7.732,49.497 7.811,49.664 7.907,49.823 8.017,49.972 8.141,50.109 8.278,50.233 8.427,50.343 8.586,50.439 8.753,50.518 8.927,50.58 9.107,50.625 9.29,50.652 9.475,50.661
"VCC 3V3" on Int2 (PWR) (split plane): 18.144,31.333 18.186,31.305 18.235,31.296 22.365,31.296 22.415,31.305 22.457,31.333 28.819,37.696 32.516,37.696 32.516,10.338 30.114,7.935 7.599,7.935 7.599,38.041 7.754,38.196 11.282,38.196
GND on Int1 (GND) (split plane): 9.66,50.652 9.754,50.638 9.755,50.64 9.759,50.64 9.788,50.634 9.809,50.635 9.83,50.633 9.859,50.636 9.888,50.636 9.908,50.64 9.929,50.643 9.936,50.645 30.495,50.645 30.498,50.643 30.522,50.632 30.545,50.62 30.568,50.613 30.59,50.604 30.616,50.599 30.641,50.591 30.665,50.589 30.688,50.584 30.714,50.584 30.741,50.581 30.741,50.583 30.917,50.575 31.091,50.549 31.262,50.506 31.429,50.446 31.588,50.371 31.739,50.28 31.881,50.175 32.001,50.066 32.01,50.055 32.021,50.047 32.126,49.931 32.227,49.795 32.314,49.649 32.386,49.496 32.444,49.336 32.485,49.172 32.51,49.004 32.517,48.848 32.516,48.834 32.516,10.338 30.114,7.935 7.599,7.935 7.599,48.682 7.596,48.71 7.596,48.739 7.592,48.76 7.589,48.781 7.589,48.783 7.598,48.96 7.625,49.143 7.67,49.323 7.732,49.497 7.811,49.664 7.907,49.823 8.017,49.972 8.141,50.109 8.278,50.233 8.427,50.343 8.586,50.439 8.753,50.518 8.927,50.58 9.107,50.625 9.29,50.652 9.475,50.661

## Other copper
Int2 (PWR) (plane layer: these items are gaps in the copper):
  lines w0.254: 7.35,45.262 7.35,48.34 ; 7.444,37.81 7.444,38.069 7.7,38.325 11.335,38.325 18.235,31.425 22.365,31.425 28.765,37.825 32.331,37.825 32.825,37.825 32.85,37.8 32.85,37.275 ; 32.75,41.138 32.75,41.99

## Silkscreen, mask and mechanical layers (free items; w line width, h text height)
Top Overlay:
  drawing of 21 lines, arcs and shapes, not listed
  text "GND" at 22.55,47.675 h1 r90
  text "Motor Drivers" at 14.218,18.759 h1.5
  text "REV-A" at 14.218,17.492 h1.5
  text ".Print_Date" at 14.237,15.99 h1.5
  text "Javier Bolduc" at 8.252,8.538 h1.5
Board:
  lines w0.2: 4.953,8.551 4.995,8.509 4.995,5 35.289,5 35.289,10.961 35.2,11.05 ; 4.984,13.729 4.984,43 ; 5,48.05 5,52.825 35.206,52.825 35.206,47.475 ; 35.258,16.017 35.258,42.31
  lines w0.254: 0,-0.044 40.174,-0.044 40.174,57.85 0,57.85 0,-0.044
  lines w0.5: 7.083,48.67 cw(c9.475,48.775) 9.83,51.143 ; 7.089,48.682 7.089,7.425 30.325,7.425 33.026,10.126 33.026,48.834 ccw(c30.789,48.834) 32.371,50.416 ccw(c30.741,48.785) 30.741,51.092 ; 9.836,51.155 30.664,51.155
Drill Drawing:
  drawing of 294 lines, arcs and shapes, not listed
  text "Symbol" at 48.608,102.811 h1.8
  text "Count" at 55.658,102.811 h1.8
  text "Hole Size" at 62.875,102.811 h1.8
  text "Plated" at 76.58,102.811 h1.8
  text "Hole Type" at 82.769,102.811 h1.8
  text "Drill Layer Pair" at 91.781,102.811 h1.8
  text "Via/Pad" at 108.842,102.811 h1.8
  text "Pad Shape" at 116.226,102.811 h1.8
  text "Hole Length" at 125.873,102.811 h1.8
  text "88" at 55.658,99.708 h1.5
  text "0.300mm (11.81mil)" at 62.875,99.708 h1.5
  text "PTH" at 76.58,99.708 h1.5
  text "Round" at 82.769,99.708 h1.5
  text "Top Layer - Bottom Layer" at 91.781,99.708 h1.5
  text "Via" at 108.842,99.708 h1.5
  text "Rounded" at 116.226,99.708 h1.5
  text "-" at 125.873,99.708 h1.5
  text "24" at 55.658,96.605 h1.5
  text "0.600mm (23.62mil)" at 62.875,96.605 h1.5
  text "NPTH" at 76.58,96.605 h1.5
  text "Round" at 82.769,96.605 h1.5
  text "Top Layer - Bottom Layer" at 91.781,96.605 h1.5
  text "Pad" at 108.842,96.605 h1.5
  text "Rounded" at 116.226,96.605 h1.5
  text "-" at 125.873,96.605 h1.5
  text "16" at 55.658,93.502 h1.5
  text "0.889mm (35.00mil)" at 62.875,93.502 h1.5
  text "PTH" at 76.58,93.502 h1.5
  text "Round" at 82.769,93.502 h1.5
  text "Top Layer - Bottom Layer" at 91.781,93.502 h1.5
  text "Pad" at 108.842,93.502 h1.5
  text "(Mixed)" at 116.226,93.502 h1.5
  text "-" at 125.873,93.502 h1.5
  text "6" at 55.658,90.399 h1.5
  text "1.300mm (51.18mil)" at 62.875,90.399 h1.5
  text "PTH" at 76.58,90.399 h1.5
  text "Round" at 82.769,90.399 h1.5
  text "Top Layer - Bottom Layer" at 91.781,90.399 h1.5
  text "Pad" at 108.842,90.399 h1.5
  text "(Mixed)" at 116.226,90.399 h1.5
  text "-" at 125.873,90.399 h1.5
  text "4" at 55.658,87.296 h1.5
  text "2.500mm (98.43mil)" at 62.875,87.296 h1.5
  text "NPTH" at 76.58,87.296 h1.5
  text "Round" at 82.769,87.296 h1.5
  text "Top Layer - Bottom Layer" at 91.781,87.296 h1.5
  text "Pad" at 108.842,87.296 h1.5
  text "Rounded" at 116.226,87.296 h1.5
  text "-" at 125.873,87.296 h1.5
  text "138 Total" at 55.658,84.192 h1.5
  text "Layer" at 46.684,78.689 h1.5
  text "Name" at 52.96,78.689 h1.5
  text "Thickness" at 68.969,78.689 h1.5
  text "Gerber" at 77.926,78.689 h1.5
  text "Board Layer Stack" at 85.048,78.689 h1.5
  text "Top Overlay" at 52.96,75.689 h1.5
  text "GTO" at 77.926,75.689 h1.5
  text "Top Solder" at 52.96,72.689 h1.5
  text "0,025mm" at 68.969,72.689 h1.5
  text "GTS" at 77.926,72.689 h1.5
  text "Top Surface Finish" at 52.96,69.689 h1.5
  text "0,020mm" at 68.969,69.689 h1.5
  text "1" at 46.684,66.689 h1.5
  text "Top Layer" at 52.96,66.689 h1.5
  text "0,035mm" at 68.969,66.689 h1.5
  text "GTL" at 77.926,66.689 h1.5
  text "Dielectric 1" at 52.96,63.689 h1.5
  text "0,130mm" at 68.969,63.689 h1.5
  text "Dielectric 2" at 52.96,60.689 h1.5
  text "0,130mm" at 68.969,60.689 h1.5
  text "2" at 46.683,57.689 h1.5
  text "Int1 (GND)" at 52.96,57.689 h1.5
  text "0,035mm" at 68.969,57.689 h1.5
  text "GP1" at 77.926,57.689 h1.5
  text "Dielectric 3" at 52.96,54.689 h1.5
  text "0,711mm" at 68.969,54.689 h1.5
  text "3" at 46.684,51.689 h1.5
  text "Int2 (PWR)" at 52.96,51.689 h1.5
  text "0,035mm" at 68.969,51.689 h1.5
  text "GP2" at 77.926,51.689 h1.5
  text "Dielectric 4" at 52.96,48.689 h1.5
  text "0,130mm" at 68.969,48.689 h1.5
  text "Dielectric 5" at 52.96,45.689 h1.5
  text "0,130mm" at 68.969,45.689 h1.5
  text "4" at 46.684,42.689 h1.5
  text "Bottom Layer" at 52.96,42.689 h1.5
  text "0,035mm" at 68.969,42.689 h1.5
  text "GBL" at 77.926,42.689 h1.5
  text "Bottom Surface Finish" at 52.96,39.689 h1.5
  text "0,020mm" at 68.969,39.689 h1.5
  text "Bottom Solder" at 52.96,36.689 h1.5
  text "0,025mm" at 68.969,36.689 h1.5
  text "GBS" at 77.926,36.689 h1.5
  text "Bottom Overlay" at 52.96,33.689 h1.5
  text "GBO" at 77.926,33.689 h1.5
  text "Total board thickness:" at 46.684,30.689 h1.5
  text "1,460mm" at 68.969,30.689 h1.5

## Text inside footprints (layer, text, board x,y; h text height)
MB1: Top Overlay "GND" at 8.637,10.353 h1.5; Top Overlay "SCL" at 27.024,17.977 h1.5; Top Overlay "GND" at 26.58,10.253 h1.5; Top Overlay "CS" at 9.636,23.016 h1.5; Top Overlay "SDI" at 9.368,15.427 h1.5; Top Overlay "3V3" at 9.112,12.912 h1.5; Top Overlay "5V" at 27.665,12.856 h1.5; Top Overlay "INT" at 27.509,25.501 h1.5; Top Overlay "PWM" at 26.406,28.075 h1.4; Top Overlay "TX" at 27.665,23.016 h1.5; Top Overlay "SCK" at 8.874,20.4 h1.5; Top Overlay "RST" at 9.158,25.556 h1.5; Top Overlay "AN" at 9.636,28.096 h1.5; Top Overlay "RX" at 27.665,20.476 h1.5; Top Overlay "SDO" at 8.796,17.955 h1.5; Top Overlay "SDA" at 26.908,15.409 h1.5; Bottom Overlay "SDO" at 13.673,17.97 h1.5; Bottom Overlay "INT" at 30.667,25.48 h1.5; Bottom Overlay "GND" at 31.429,10.24 h1.5; Bottom Overlay "RX" at 30.667,20.476 h1.5; Bottom Overlay "CS" at 13.192,23.016 h1.5; Bottom Overlay "GND" at 14.056,10.342 h1.5; Bottom Overlay "SCK" at 13.673,20.51 h1.5; Bottom Overlay "SDI" at 13.192,15.396 h1.5; Bottom Overlay "3V3" at 13.384,12.856 h1.5; Bottom Overlay "SDA" at 31.124,15.447 h1.5; Bottom Overlay "AN" at 13.192,28.02 h1.5; Bottom Overlay "PWM" at 31.429,27.944 h1.5; Bottom Overlay "SCL" at 31.124,17.86 h1.5; Bottom Overlay "5V" at 30.172,12.78 h1.5; Bottom Overlay "RST" at 13.548,25.607 h1.5; Bottom Overlay "TX" at 30.667,22.94 h1.5